# Altium PCB 最小系统板PCB.PcbDoc
Units mil, origin at the board's own origin, x right, y up, seen from the top; angles counter-clockwise.
Board outline 2054.19 x 1157.6 mil, 2 copper layers (Top Layer, Bottom Layer); 29 components, 44 nets, 144 pads, 14 vias.
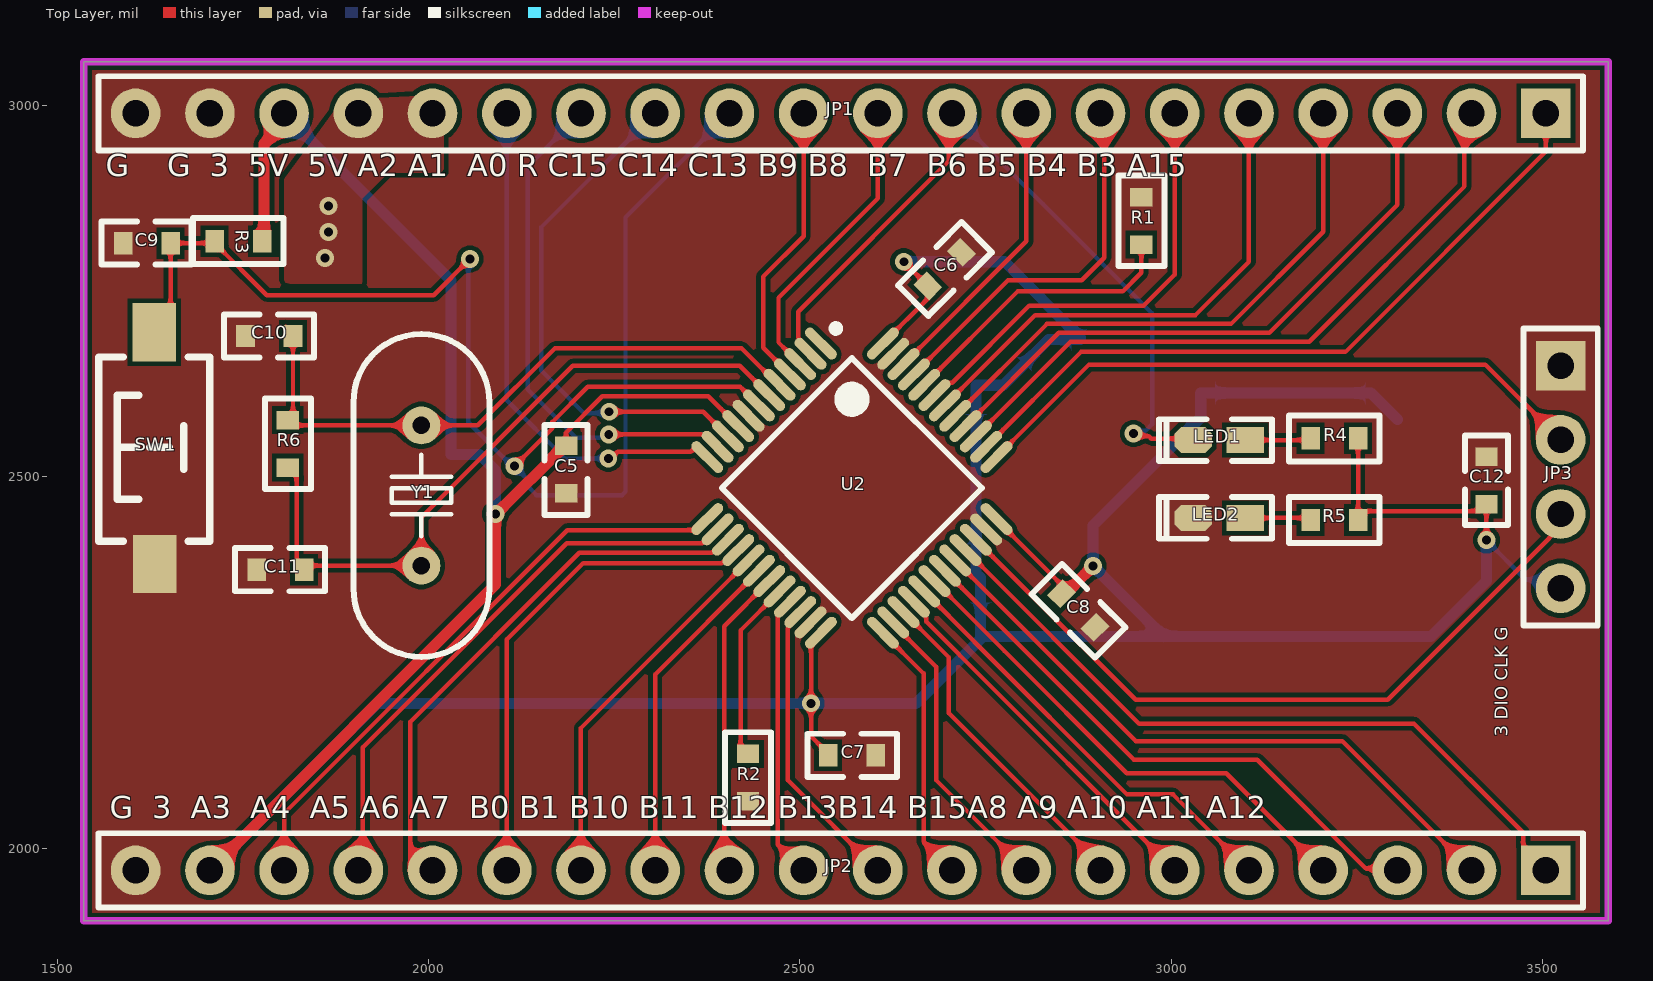
[diagram p0: Top Layer view]
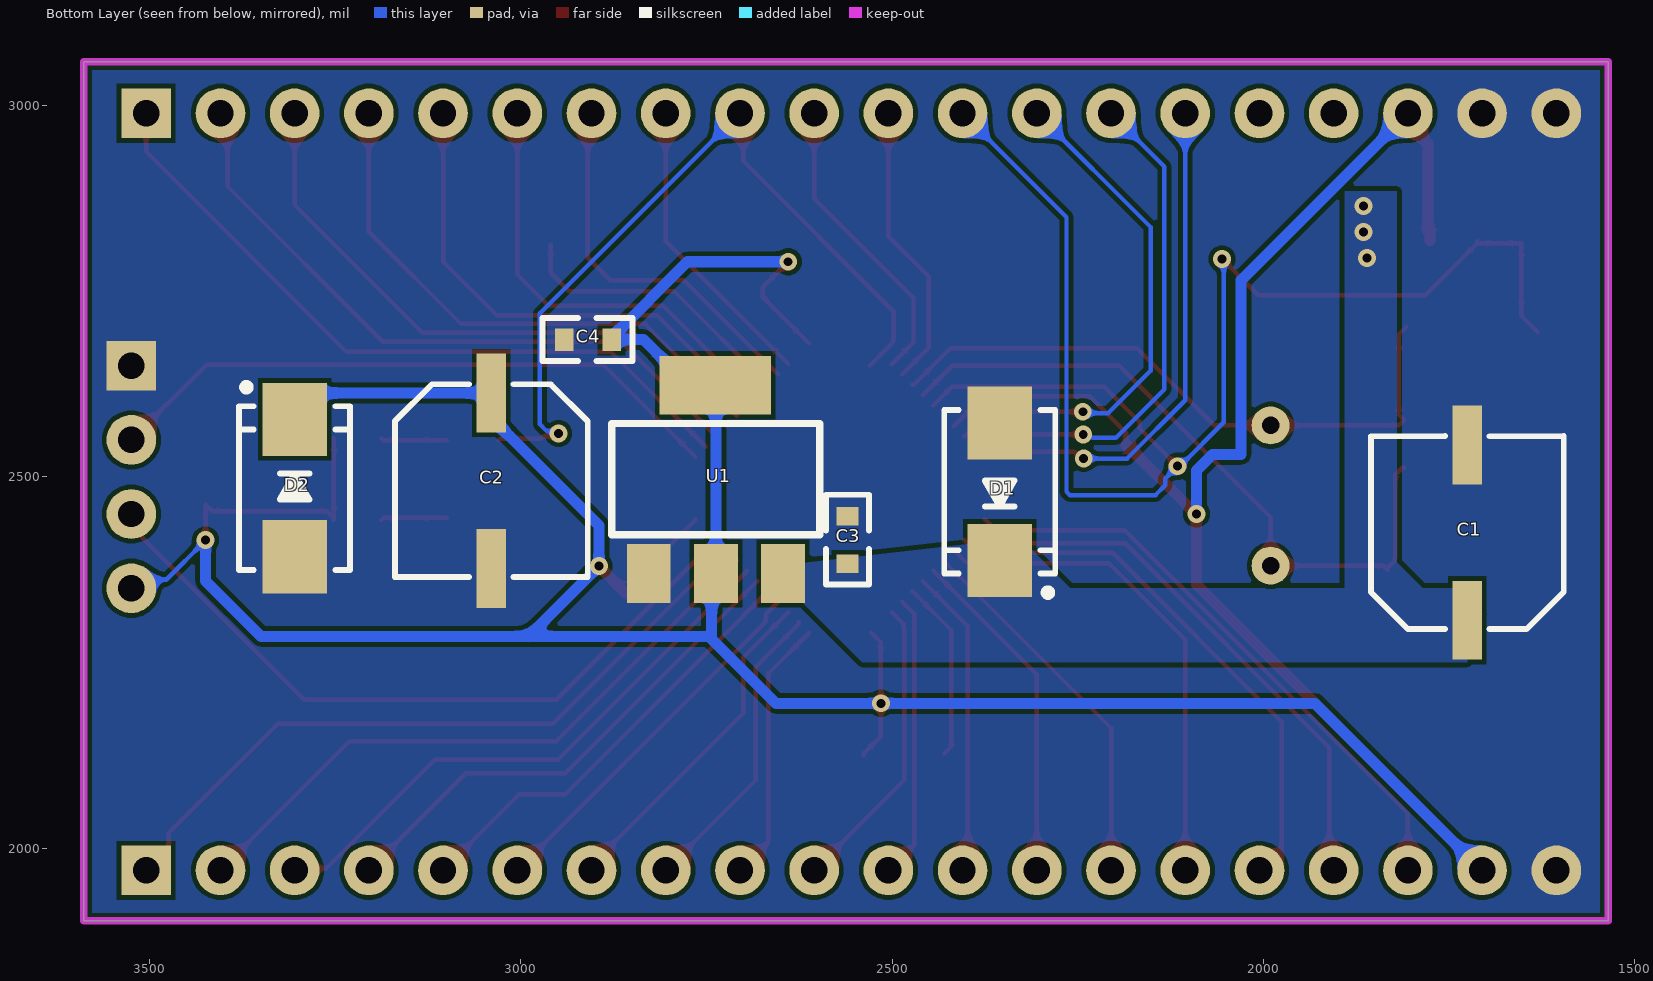
[diagram p1: Bottom Layer view, seen from below]

## Layer stack, top to bottom
Top Solder: solder mask 0.4, Solder Resist, Dk 3.5
Top Layer: signal copper 1.4
Dielectric 1: dielectric 12.6, FR-4, Dk 4.8
Bottom Layer: signal copper 1.4
Bottom Solder: solder mask 0.4, Solder Resist, Dk 3.5

## Board outline
1535,1901.89 3589.19,1901.89 3589.19,3059.49 1535,3059.49

## Design rules (kind name [scope] priority, off if disabled: settings)
Clearance [All] p1: gap=6 ignorepadtopadclearanceinfootprint=TRUE
PolygonConnect PolygonConnect_4 [All] p1: connectstyle=Direct reliefconductorwidth=10 reliefentries=4 polygonreliefangle="90 Angle" airgapwidth=10
PolygonConnect PolygonConnect_3 [All] p2: thpad.connectstyle=Direct thpad.reliefconductorwidth=10 thpad.reliefentries=4 thpad.polygonreliefangle="90 Angle" thpad.airgapwidth=10 smdpad.connectstyle=Direct smdpad.reliefconductorwidth=10 smdpad.reliefentries=4 smdpad.polygonreliefangle="90 Angle" smdpad.airgapwidth=10 via.connectstyle=Relief via.reliefconductorwidth=10 via.reliefentries=4 via.polygonreliefangle="90 Angle" via.airgapwidth=10
PolygonConnect PolygonConnect_2 [All] p3: thpad.connectstyle=Direct thpad.reliefconductorwidth=10 thpad.reliefentries=4 thpad.polygonreliefangle="90 Angle" thpad.airgapwidth=10 smdpad.connectstyle=Direct smdpad.reliefconductorwidth=10 smdpad.reliefentries=4 smdpad.polygonreliefangle="90 Angle" smdpad.airgapwidth=10 via.connectstyle=Relief via.reliefconductorwidth=10 via.reliefentries=4 via.polygonreliefangle="90 Angle" via.airgapwidth=10
PolygonConnect PolygonConnect_1 [All] p4: thpad.connectstyle=Direct thpad.reliefconductorwidth=10 thpad.reliefentries=4 thpad.polygonreliefangle="90 Angle" thpad.airgapwidth=10 smdpad.connectstyle=Direct smdpad.reliefconductorwidth=10 smdpad.reliefentries=4 smdpad.polygonreliefangle="90 Angle" smdpad.airgapwidth=10 via.connectstyle=Relief via.reliefconductorwidth=10 via.reliefentries=4 via.polygonreliefangle="90 Angle" via.airgapwidth=10
PolygonConnect [All] p5: connectstyle=Relief reliefconductorwidth=10 reliefentries=4 polygonreliefangle="90 Angle" airgapwidth=10
RoutingVias [All] p1: holewidth=28 width=50 viastyle="Through Hole" minholewidth=28 minwidth=50 maxholewidth=28 maxwidth=50
SolderMaskExpansion [All] p1: expansion=4 istentingtop=FALSE
Width [All] p1: maxlimit=35 minlimit=6 preferedwidth=15
30 further rules are at their usual default settings.

## Components (designator, comment, footprint, x,y, rotation, side; value= is the part's Value field where it differs from the comment)
C1 "220uf/16V" "CM D(6.3)" 1725,2425 r90 bottom
C2 "220uf/16V" "CM D(6.3)" 3040,2495 r270 bottom
C3 "0603" 0603C 2560,2415 r270 bottom value=104
C4 "0603" 0603C 2910,2685 r180 bottom value=104
C5 "0603" 0603C 2185,2510 r90 top value=104
C6 "0603" 0603C 2695,2780 r225 top value=104
C7 "0603" 0603C 2570,2125 r180 top value=104
C8 "0603" 0603C 2875,2320 r135 top value=104
C9 "0603" 0603C 1620,2815 r0 top value=104
C10 "0603" 0603C 1785,2690 r0 top value=22pf
C11 "0603" 0603C 1800,2375 r0 top value=22pf
C12 "0603" 0603C 3425,2495 r270 top value=104
D1 "SMBJ5.0A" SMB 2355,2480 r270 bottom
D2 "SMBJ3.3A" SMB 3305,2485 r90 bottom
JP1 "20p_G" HDR-1X20 3505,2990 r180 top
JP2 "20p_G" HDR-1X20 3505,1970 r180 top
JP3 "HDR-1X4" HDR-1X4 3525,2650 r270 top
LED1 "LED" "LED 0603B" 3065,2550 r180 top
LED2 "电源指示灯（红）" "LED 0603R" 3065,2445 r180 top
R1 "0603" 0603R 2960,2845 r270 top value=100K
R2 "0603" 0603R 2430,2095 r90 top value=100K
R3 "0603" 0603R 1743.34,2817.7 r0 top value=10K
R4 "0603" 0603R 3220,2552 r180 top value=220R
R5 "0603" 0603R 3220,2442 r180 top value=220R
R6 "0603" 0603R 1810,2544.5 r270 top value=1M
SW1 "TSW" "TSW SMD-3*6*2.5" 1630,2540 r90 top
U1 "AMS1117-3.3" SOT-223 2740,2500 r180 bottom
U2 "STM32F103C8T6" LQFP-48 2570,2485 r315 top
Y1 "8MHz" "OSC HC-49S" 1990,2475 r270 top

## Footprints (in the part's own frame and the unit in brackets; to place one, negate y for a bottom-side part, rotate by r counter-clockwise, add the part's x,y. Pads: shape width x height; smd on the part's side, far side on the other; paste and mask are expansions set on the pad)
0603C [mil] "1.6mmx0.8mm"
  rect 25x30 smd: 1(-32,0) 2(32,0)
  silkscreen extent -61,-29 60,29, body extent -31,-16 31,16, height 32
0603R [mil]
  rect 25x30 smd: 1(-32,0) 2(32,0)
  silkscreen extent -61,-31 61,31, body extent -32,-16 31,16, height 18
"CM D(6.3)" [mm] "直径6.3mm"
  rect 2.7x1 smd: 1(-3,0) 2(3,0)
  silkscreen extent -3.3,-3.3 3.3,3.3, body extent -3.5,-3.3 3.5,3.3, height 5.2
HDR-1X4 [mm] "排针，4脚"
  rect 1.7x1.7 hole 0.9: 1(0,0)
  round 1.7 hole 0.9: 2(2.54,0) 3(5.08,0) 4(7.62,0)
  silkscreen extent -1.27,-1.27 8.89,1.27, body extent -1.27,-1.27 8.89,1.27, height 8.5
HDR-1X20 [mm]
  rect 1.7x1.7 hole 0.9: 1(0,0)
  round 1.7 hole 0.9: 2(2.54,0) 3(5.08,0) 4(7.62,0) 5(10.16,0) 6(12.7,0) 7(15.24,0) 8(17.78,0) 9(20.32,0) 10(22.86,0) 11(25.4,0) 12(27.94,0) 13(30.48,0) 14(33.02,0) 15(35.56,0) 16(38.1,0) 17(40.64,0) 18(43.18,0) 19(45.72,0) 20(48.26,0)
  silkscreen extent -1.27,-1.27 49.53,1.27, body extent -1.27,-1.27 49.53,1.27, height 8.5
"LED 0603B" [mil] "蓝色0603LED"
  rect 50x35 smd: 1(-35,0.26)
  oct 50x35 smd: 2(35,0.26)
  silkscreen extent -71,-28 81,28, body extent -31,-16 32,16, height 24
"LED 0603R" [mil] "红色0603LED"
  rect 50x35 smd: 1(-35,0.26)
  oct 50x35 smd: 2(35,0.26)
  silkscreen extent -71,-28 81,28, body extent -31,-16 31,16, height 18
LQFP-48 [mm] "LQFP, 48-Leads, Body 7.10x7.10mm, Pitch 0.50mm, IPC Medium Density"
  oval 1.4x0.35 smd: 1(-4.25,2.75) 2(-4.25,2.25) 3(-4.25,1.75) 4(-4.25,1.25) 5(-4.25,0.75) 6(-4.25,0.25) 7(-4.25,-0.25) 8(-4.25,-0.75) 9(-4.25,-1.25) 10(-4.25,-1.75) 11(-4.25,-2.25) 12(-4.25,-2.75) 25(4.25,-2.75) 26(4.25,-2.25) 27(4.25,-1.75) 28(4.25,-1.25) 29(4.25,-0.75) 30(4.25,-0.25) 31(4.25,0.25) 32(4.25,0.75) 33(4.25,1.25) 34(4.25,1.75) 35(4.25,2.25) 36(4.25,2.75)
  oval 0.35x1.4 smd: 13(-2.75,-4.25) 14(-2.25,-4.25) 15(-1.75,-4.25) 16(-1.25,-4.25) 17(-0.75,-4.25) 18(-0.25,-4.25) 19(0.25,-4.25) 20(0.75,-4.25) 21(1.25,-4.25) 22(1.75,-4.25) 23(2.25,-4.25) 24(2.75,-4.25) 37(2.75,4.25) 38(2.25,4.25) 39(1.75,4.25) 40(1.25,4.25) 41(0.75,4.25) 42(0.25,4.25) 43(-0.25,4.25) 44(-0.75,4.25) 45(-1.25,4.25) 46(-1.75,4.25) 47(-2.25,4.25) 48(-2.75,4.25)
  silkscreen extent -4.37,-3.15 3.15,3.6, body extent -4.55,-4.55 4.55,4.55, height 1.6
"OSC HC-49S" [mm]
  round 1.3 hole 0.6: 1(-2.4,0) 2(2.4,0)
  silkscreen extent -5.52,-2.32 5.52,2.33, body extent -5.52,-2.32 5.53,2.33, height 4.13
SMB [mm] "4.7*3.9*2.2mm(长宽高，不包括引脚）"
  rect 2.5x2.2 smd: 1(-2.35,0) 2(2.35,0)
  silkscreen extent -2.8,-1.9 3.57,1.9, body extent -2.63,-1.8 2.67,1.8, height 2.35
SOT-223 [mil] "AMS1117封装"
  rect 59x79 smd: 1(-88,-130) 2(2.55,-130) 3(93.1,-130)
  rect 150x79 smd: 4(1.88,123.54)
  silkscreen extent -137,-78 143,72, body extent -126,-139 130,135, height 67
"TSW SMD-3*6*2.5" [mm] "3*6*2.5mm"
  rect 2x1.5 smd: 1(-3.996,-0.02) 2(3.937,0)
  silkscreen extent -3.21,-1.9 3.09,1.9, body extent -4,-1.88 4,1.62, height 2.59

## Part data
C1 C2: library part CAP, "极性电容"
C3 C4 C5 C6 C7 C8 C9 C10 C11 C12: library part C, "贴片电容"
D1 D2: library part SMBJ, "TVS二极管"
JP1 JP2: "20针排针"
JP3: library part 4p_G, "4针排针", BOM名称=4P接插件, 学习资源=www.ooocke.com, 版权归属=源创客
LED1: "RED 蓝、红", PackageDocument=Feb-2002, LatestRevisionDate=17-Jul-2002, LatestRevisionNote="Re-released for DXP Platform.", PackageReference=3.2X1.6X1.1, Published=8-Jun-2000, Publisher="Altium Limited"
LED2: library part LED, "RED 蓝、红", PackageDocument=Feb-2002, LatestRevisionDate=17-Jul-2002, LatestRevisionNote="Re-released for DXP Platform.", PackageReference=3.2X1.6X1.1, Published=8-Jun-2000, Publisher="Altium Limited"
R1 R2 R3 R4 R5 R6: library part R, "贴片电阻"
SW1: "轻触开关", BOM名称=3x6轻触开关, 学习资源=www.ooocke.com, 版权归属=源创客
U1: library part AMS1117, "LDO5-3.3稳压芯片"
U2: "MCU"
Y1: library part XTAL, "晶振", LatestRevisionDate=17-Jul-2002, LatestRevisionNote="Re-released for DXP Platform.", Published=8-Jun-2000, Publisher="Altium Limited"

## Via types
v1: diameter 24, hole 12, Top Layer to Bottom Layer, tented both sides, 14 vias

## Nets (pads, with @x,y where several pads share a name; then routed paths per layer and width w, separated by ;. In a path a pad name is that pad's centre, name@x,y a point inside that pad or via, vN(x,y) a via of type N, cw(c..) or ccw(c..) an arc to the next point about the centre after c; other vN are vias at no path point)
BOOT0: R1.2 U2.44 | length 393
  Top Layer w6: U2.44 2793.24,2750 2935,2750 2960,2775 R1.2
BOOT1: R2.2 U2.20 | length 244.7
  Top Layer w6: R2.2 2420,2137 2420,2293.24 U2.20
GND: C1.2 C2.2 C3.1 C4.1 C5.1 C6.1 C7.1 C8.1 C9.1 C10.1 C11.1 C12.1 D1.1 D2.1 JP1.19 JP1.20 JP2.20 JP3.1 LED2.2 R1.1 R2.1 SW1.1 U1.1 U2.8 U2.23 U2.35 U2.47
NetLED1_1: LED1.1 R4.2 | length 88.9
  Top Layer w6: LED1.1 3185.75,2549.74 R4.2
NetLED2_1: LED2.1 R5.2 | length 89.1
  Top Layer w6: LED2.1 3185.26,2444.74 R5.2
OSCIN: C10.2 R6.1 U2.5 Y1.1 | length 861.9
  Top Layer w6: C10.2@1807,2702.5 1817,2692.5 C10.2 1817,2583.5 R6.1 1817.01,2569.49 Y1.1 2066.11,2569.49 2169.98,2673.36 2421.3,2673.36 2470.46,2624.19 U2.5
OSCOUT: C11.2 R6.2 U2.6 Y1.2 | length 943.1
  Top Layer w6: R6.2 1812.44,2512.5 1821.94,2503 1821.94,2390.51 1822.5,2389.96 1822.5,2387 1832,2377.5 C11.2 1837.51,2380.51 Y1.2 1990,2445.72 2194.11,2649.83 2419.09,2649.83 U2.6
PA0: JP1.13 U2.10 | length 699.7
  Top Layer w6: v1(2243.03,2587.86) 2369.71,2587.86 U2.10
  Bottom Layer w6: v1(2243.03,2587.86) 2241.16,2585.99 2208.99,2585.99 2151.78,2643.2 2151.78,2836.78 JP1.13
PA1: JP1.14 U2.11 | length 693.6
  Top Layer w6: v1(2242.43,2557.26) 2367.35,2557.26 2367.83,2556.78 2372.94,2556.78 U2.11
  Bottom Layer w6: JP1.14 2133,2918 2133,2618.09 2198.38,2552.71 2229.92,2552.71 2231.02,2553.82 2238.99,2553.82 v1(2242.43,2557.26)
PA2: JP1.15 U2.12 | length 700.1
  Top Layer w6: v1(2241.84,2524.83) 2245.4,2524.83 2254.36,2533.79 2353.11,2533.79 2358.06,2538.74 2363.14,2538.74 U2.12
  Bottom Layer w6: JP1.15 2105,2603.28 2183.45,2524.83 v1(2241.84,2524.83)
PA3: JP2.18 U2.13 | length 811.1
  Top Layer w6: JP2.18 1805,2046.67 2186.7,2428.36 2360.25,2428.36 U2.13
PA4: JP2.17 U2.14 | length 767.8
  Top Layer w6: JP2.17 1911.22,1976.22 1911.22,2135.91 2186.03,2410.72 2368.34,2410.72 2386.94,2429.32 U2.14
PA5: JP2.16 U2.15 | length 734.6
  Top Layer w6: JP2.16@1974.96,1965 1974.96,2169.96 2202.87,2397.87 2380.95,2397.87 2382.38,2399.3 2386.86,2399.3 U2.15
PA6: JP2.15 U2.16 | length 672.8
  Top Layer w6: JP2.15 2105,2281.08 2207.94,2384.01 2394.87,2384.01 2396.23,2385.38 2400.78,2385.38 U2.16
PA7: JP2.14 U2.17 | length 511.1
  Top Layer w6: JP2.14 2205,2161.76 U2.17
PA8: JP2.5 U2.29 | length 593.4
  Top Layer w6: U2.29 2735,2278.24 2735,2277.93 2940.72,2072.21 3002.79,2072.21 JP2.5
PA9: JP2.4 U2.30 | length 685.1
  Top Layer w6: U2.30 2775,2266.08 2940.36,2100.72 3074.28,2100.72 JP2.4
PA10: JP2.3 U2.31 | length 776.9
  Top Layer w6: U2.31 2810,2258.92 2950.11,2118.81 3116.24,2118.81 3262.54,1972.52 3302.48,1972.52 JP2.3
PA11: JP2.2 U2.32 | length 868.8
  Top Layer w6: U2.32 2840,2256.76 2952.73,2144.03 3230.97,2144.03 JP2.2
PA12: JP2.1 U2.33 | length 972.3
  Top Layer w6: U2.33 2956.99,2167.6 3327.4,2167.6 3474.54,2020.46 3474.54,2000.46 JP2.1
PA15: JP1.1 U2.38 | length 970.4
  Top Layer w6: U2.38 2878.76,2668.48 3235.08,2668.48 3505,2938.4 JP1.1
PB0: JP2.13 U2.18 | length 461.5
  Top Layer w6: JP2.13 2305,2233.92 U2.18
PB1: JP2.12 U2.19 | length 417.8
  Top Layer w6: JP2.12 2397.94,1977.06 2397.94,2299.02 U2.19
PB3: JP1.2 U2.39 | length 900.4
  Top Layer w6: U2.39 2864.56,2682.13 3186.08,2682.13 3395.37,2891.41 3395.37,2980.37 JP1.2
PB4: JP1.3 U2.40 | length 828.8
  Top Layer w6: U2.40 2848.72,2694.13 3132.59,2694.13 3305,2866.53 JP1.3
PB5: JP1.4 U2.41 | length 758.2
  Top Layer w6: U2.41 2832.89,2706.13 3080.81,2706.13 3205,2830.32 JP1.4
PB6: JP1.5 U2.42 | length 689.9
  Top Layer w6: U2.42 2817.05,2718.13 3033.02,2718.13 3105,2790.11 JP1.5
PB7: JP1.6 U2.43 | length 608.2
  Top Layer w6: U2.43 2683.46,2610.27 2700.05,2626.86 2705.07,2626.86 2809.1,2730.9 2963.21,2730.9 3005,2772.69 JP1.6
PB8: JP1.7 U2.45 | length 518.3
  Top Layer w6: U2.45 2780.4,2765 2879.64,2765 2910,2795.36 2910,2985 JP1.7
PB9: JP1.8 U2.46 | length 406.5
  Top Layer w6: U2.46 2805,2817.44 JP1.8
PB10: JP2.11 U2.21 | length 383.3
  Top Layer w6: U2.21 2470.38,2315.78 2470.38,2310.41 2469.9,2309.93 2469.9,2005.1 JP2.11
PB11: JP2.10 U2.22 | length 405
  Top Layer w6: U2.22 2484.3,2301.86 2484.3,2296.5 2483.82,2296.01 2483.82,2091.18 JP2.10
PB12: JP2.9 U2.25 | length 358.7
  Top Layer w6: U2.25 2666.59,2235.3 2666.59,2008.41 JP2.9
PB13: JP2.8 U2.26 | length 408.3
  Top Layer w6: U2.26 2625.68,2301.94 2683.45,2244.17 2683.45,2091.55 2760.13,2014.87 JP2.8
PB14: JP2.7 U2.27 | length 457.9
  Top Layer w6: U2.27 2700.78,2256.79 2700.78,2181.68 2905,1977.45 JP2.7
PB15: JP2.6 U2.28 | length 507.5
  Top Layer w6: U2.28 2669.62,2315.78 2669.62,2310.41 2670.1,2309.93 2670.1,2305.18 2715,2260.28 2715,2260 JP2.6
PC13: JP1.9 LED1.2 U2.2 | length 1084.8
  Top Layer w6: U2.2@2530.43,2649.85 U2.2 2498.22,2682.06 2498.22,2687.42 2497.74,2687.91 2497.74,2722.75 2700.27,2925.28 2700.27,2985.27 JP1.9 ; v1(2949.34,2558.52) 2952.79,2555.07 2969.83,2555.07 2973.34,2551.56 3028.18,2551.56 LED1.2
  Bottom Layer w6: JP1.9 2827.59,2867.41 2974.53,2720.47 2974.53,2570.98 2965.51,2561.96 2952.79,2561.96 v1(2949.34,2558.52)
PC14: JP1.10 U2.3 | length 405.5
  Top Layer w6: U2.3 2471.16,2681.28 2471.16,2741.44 2605,2875.28 JP1.10
PC15: JP1.11 U2.4 | length 389.3
  Top Layer w6: U2.4 2450.61,2673.99 2450.61,2770 2505,2824.39 JP1.11
R\S\T: C9.2 JP1.12 R3.1 SW1.2 U2.7 | length 2032.8
  Top Layer w6: SW1.2 1652,2717 C9.2 R3.1@1711.34,2815 ; R3.1 1711.34,2815.2 1781.54,2745 2006.64,2745 v1(2055.5,2793.86) ; v1(2115.48,2514.49) 2166.53,2565.54 2166.53,2574.12 2214.14,2621.73 2419.35,2621.73 U2.7
  Bottom Layer w6: v1(2055.5,2793.86) 2052.99,2791.35 2052.99,2573.78 2110.82,2515.96 v1@2110.82,2509.83 ; v1(2115.48,2514.49) v1@2110.82,2509.83 ; JP1.12 2265,2850 2265,2480 2260.65,2475.65 2145,2475.65 2131.96,2488.69 2131.96,2498.01 2120.14,2509.83 v1@2110.82,2509.83
SWCLK: JP3.2 U2.37 | length 853.8
  Top Layer w6: U2.37 2889.52,2651.4 3423.6,2651.4 JP3.2
SWDIO: JP3.3 U2.34 | length 990.7
  Top Layer w6: U2.34 2952.43,2200 3292.08,2200 3509.51,2417.43 3509.51,2418.03 3525,2433.51 JP3.3
VCC3.3: C2.1 C4.2 C5.2 C6.2 C7.2 C8.2 C12.2 D2.2 JP1.18 JP2.19 JP3.4 R3.2 R4.1 R5.1 U1.2 U1.4 U2.9 U2.24 U2.36 U2.48 | length 6355.4
  Top Layer w6: C5.2 2185,2560 2233.86,2608.86 2376.55,2608.86 U2.9 ; U2.24 2515,2276.89 v1(2515,2195) 2515,2150.5 2538,2127.5 C7.2 ; U2.48 2674.1,2742.21 2674.1,2755.65 C6.2 2672.37,2757.63 v1(2640,2790) ; U2.36 2764.87,2442.31 2852.37,2354.81 C8.2 ; R5.1 R5.1@3252,2444.48 ; R4.1 R5.1@3252,2444.48 ; v1(3425,2415) C12.2 3415.98,2453.98 3261.5,2453.98 R5.1@3252,2444.48
  Top Layer w15: JP2.19 2090,2355 v1(2090,2450) 2090.5,2450 2182.5,2542 C5.2 ; R3.2 1775.34,2833.61 1777.99,2830.96 1777.99,2948.94 1805,2975.95 JP1.18 ; C8.2 2857.63,2342.63 v1(2895,2380)
  Bottom Layer w6: v1@3425,2414.49 3477.83,2361.66 3513.34,2361.66 JP3.4
  Bottom Layer w15: JP2.19 1930,2195 v1(2515,2195) 2656.64,2195 2745.77,2284.13 ; JP1.18 2030,2765 2030,2530.4 2067.99,2530.4 2090,2508.39 v1(2090,2450) ; v1(2640,2790) 2775.5,2790 2878,2687.5 C4.2 2835.07,2685 2773.62,2623.54 U1.4 2737.45,2622.88 U1.2 2743.15,2364.3 2743.15,2286.75 2745.77,2284.13 ; D2.2 3269.41,2613.11 C2.1 3040,2579.65 2895,2434.65 v1(2895,2380) 2990,2285 ; v1(3425,2415) 3425,2414.49 3425,2360 3350,2285 2990,2285 ; 2745.77,2284.13 2746.64,2285 2990,2285
VCC5: C1.1 C3.2 D1.2 JP1.16 JP1.17 U1.3
  other v1: 1860,2795 1865,2830 1865,2865
pads on no net: U2.1

## Polygon pours and split planes (outlines as drawn)
GND on Bottom Layer "GND_L02_P009" (solid, remove dead copper, pour order 9): 1535,3060 3590,3060 3590,1900 1535,1900
VCC5 on Bottom Layer "VCC5_L02_P004" (solid, pour order 4): 1775,2340 1820,2385 1820,2885 1890,2885 1890,2855 1890,2835 1890,2325
VCC5 on Bottom Layer "VCC5_L02_P003" (solid, pour order 3): 2330,2410 2395,2410 2660,2380 2660,2370 2540,2250 1725,2250 1725,2295 1705,2315 1740,2350 2260,2350 2320,2410
GND on Top Layer "GND_L01_P008" (solid, remove dead copper, pour order 8): 1535,3060 1535.77,3059.23 3588.57,3059.23 3588.57,1903.57 3585,1900 1535,1900
VCC5 on Top Layer "VCC5_L01_P005" (solid, remove dead copper, pour order 5): 1920,3010 2015,3015 2025,3005 2020,3000 2020,2910 1945,2910 1910,2875 1910,2760 1805,2760 1805,2901.43 1885,3010

## Keep-outs
Keep-Out Layer:
  the board outline again, w10

## Silkscreen, mask and mechanical layers (free items; w line width, h text height)
Top Overlay:
  text "G    G  3  5V  5V A2 A1  A0 R C15 C14 C13 B9 B8  B7  B6 B5 B4 B3 A15" at 1565,2905 h30
  text "3 DIO CLK G" at 3459.68,2150 h30 r90
  text "G  3  A3  A4  A5 A6 A7  B0 B1 B10 B11 B12 B13B14 B15A8 A9 A10 A11 A12" at 1570,2040 h30